# Altium PCB SSCS_PCB_2Layers.PcbDoc
Units mm, origin at the board's own origin, x right, y up, seen from the top; angles counter-clockwise.
Board outline 50.93 x 54.61 mm, 2 copper layers (Top Layer, Bottom Layer); 15 components, 35 nets, 400 pads, 22 vias.
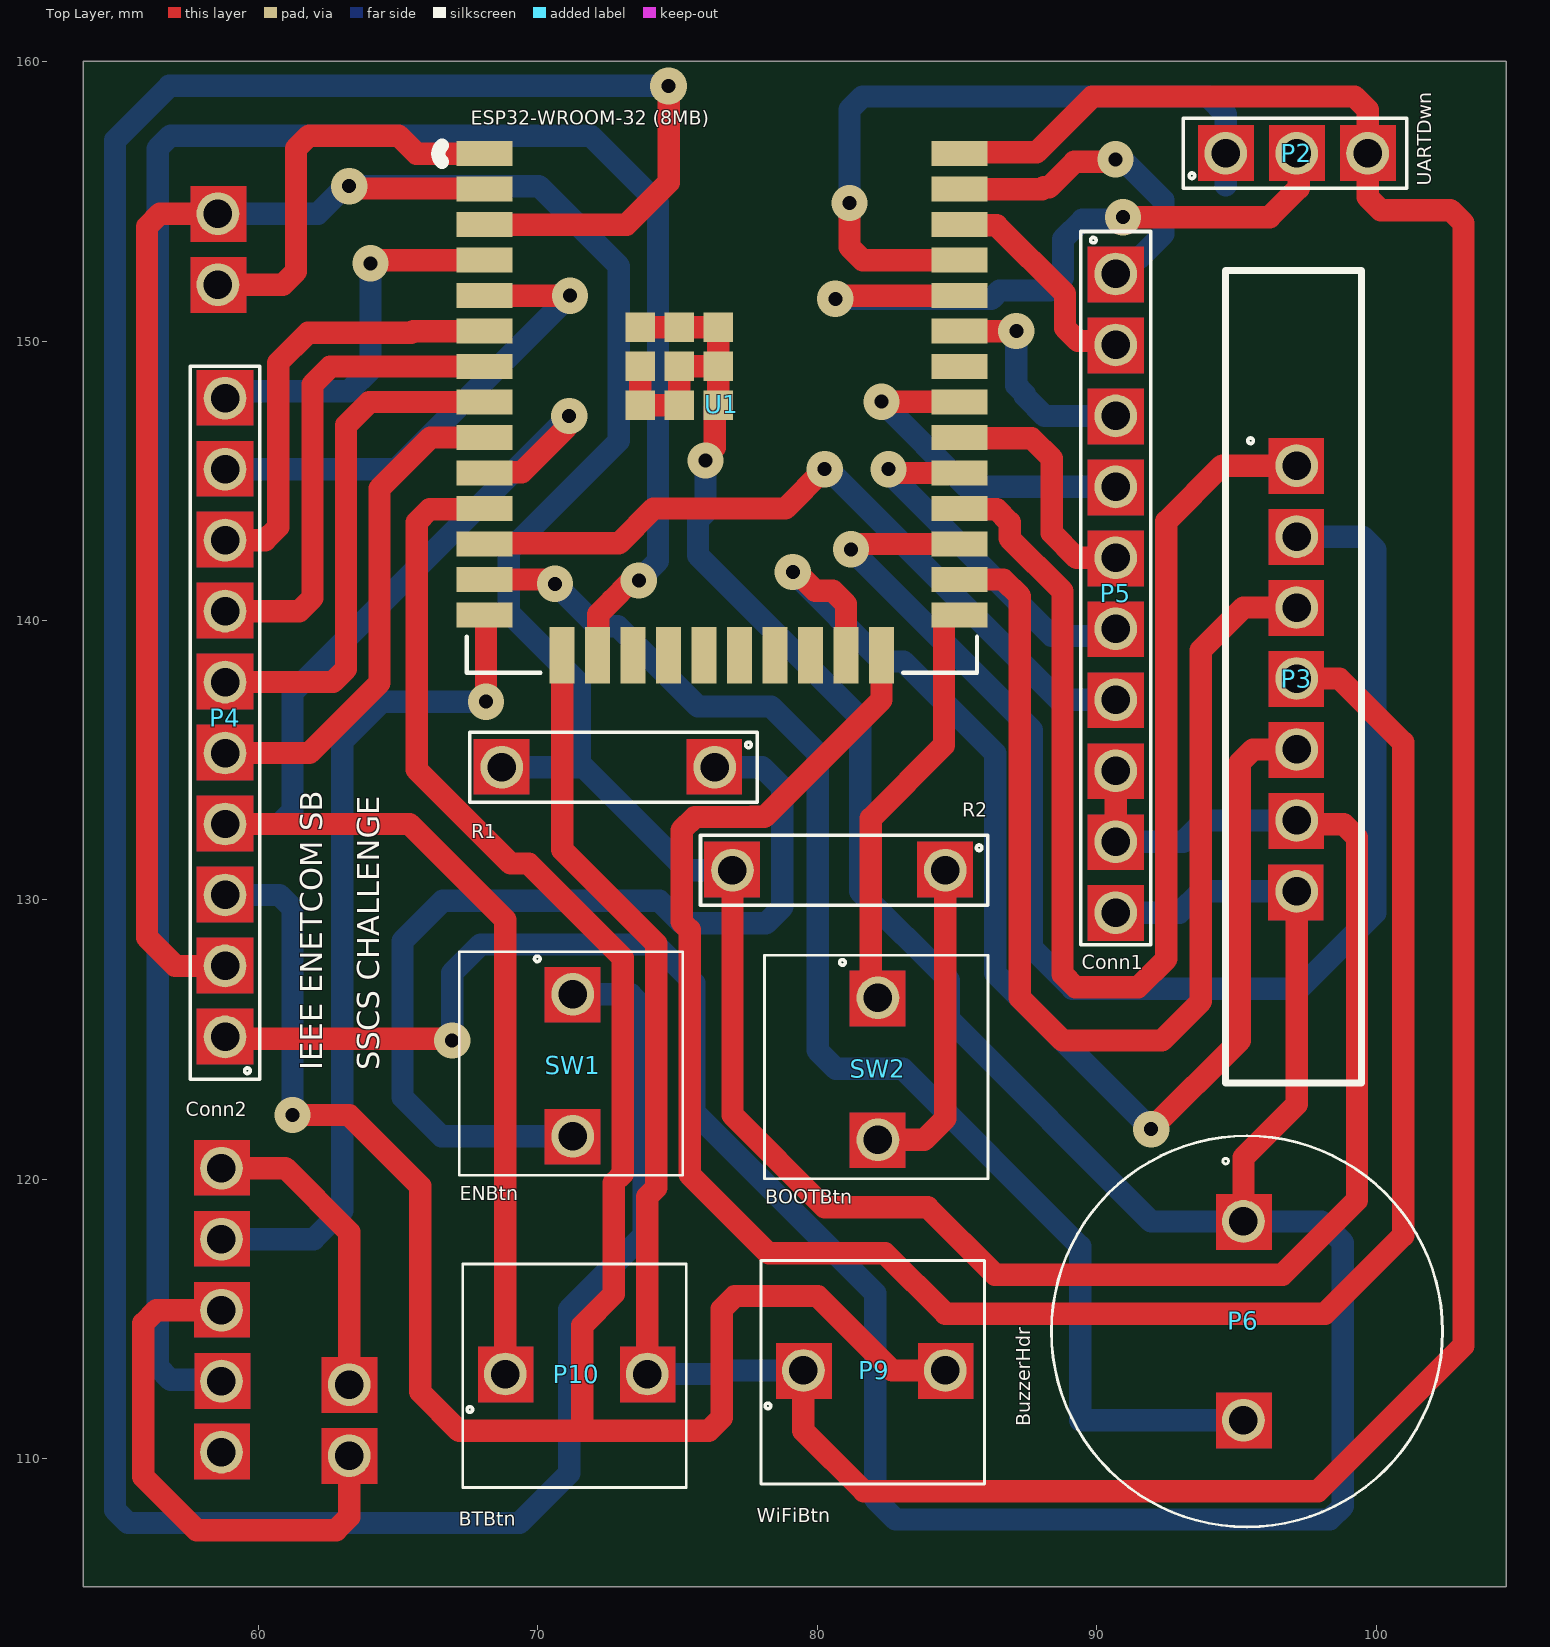
[diagram p0: Top Layer view]
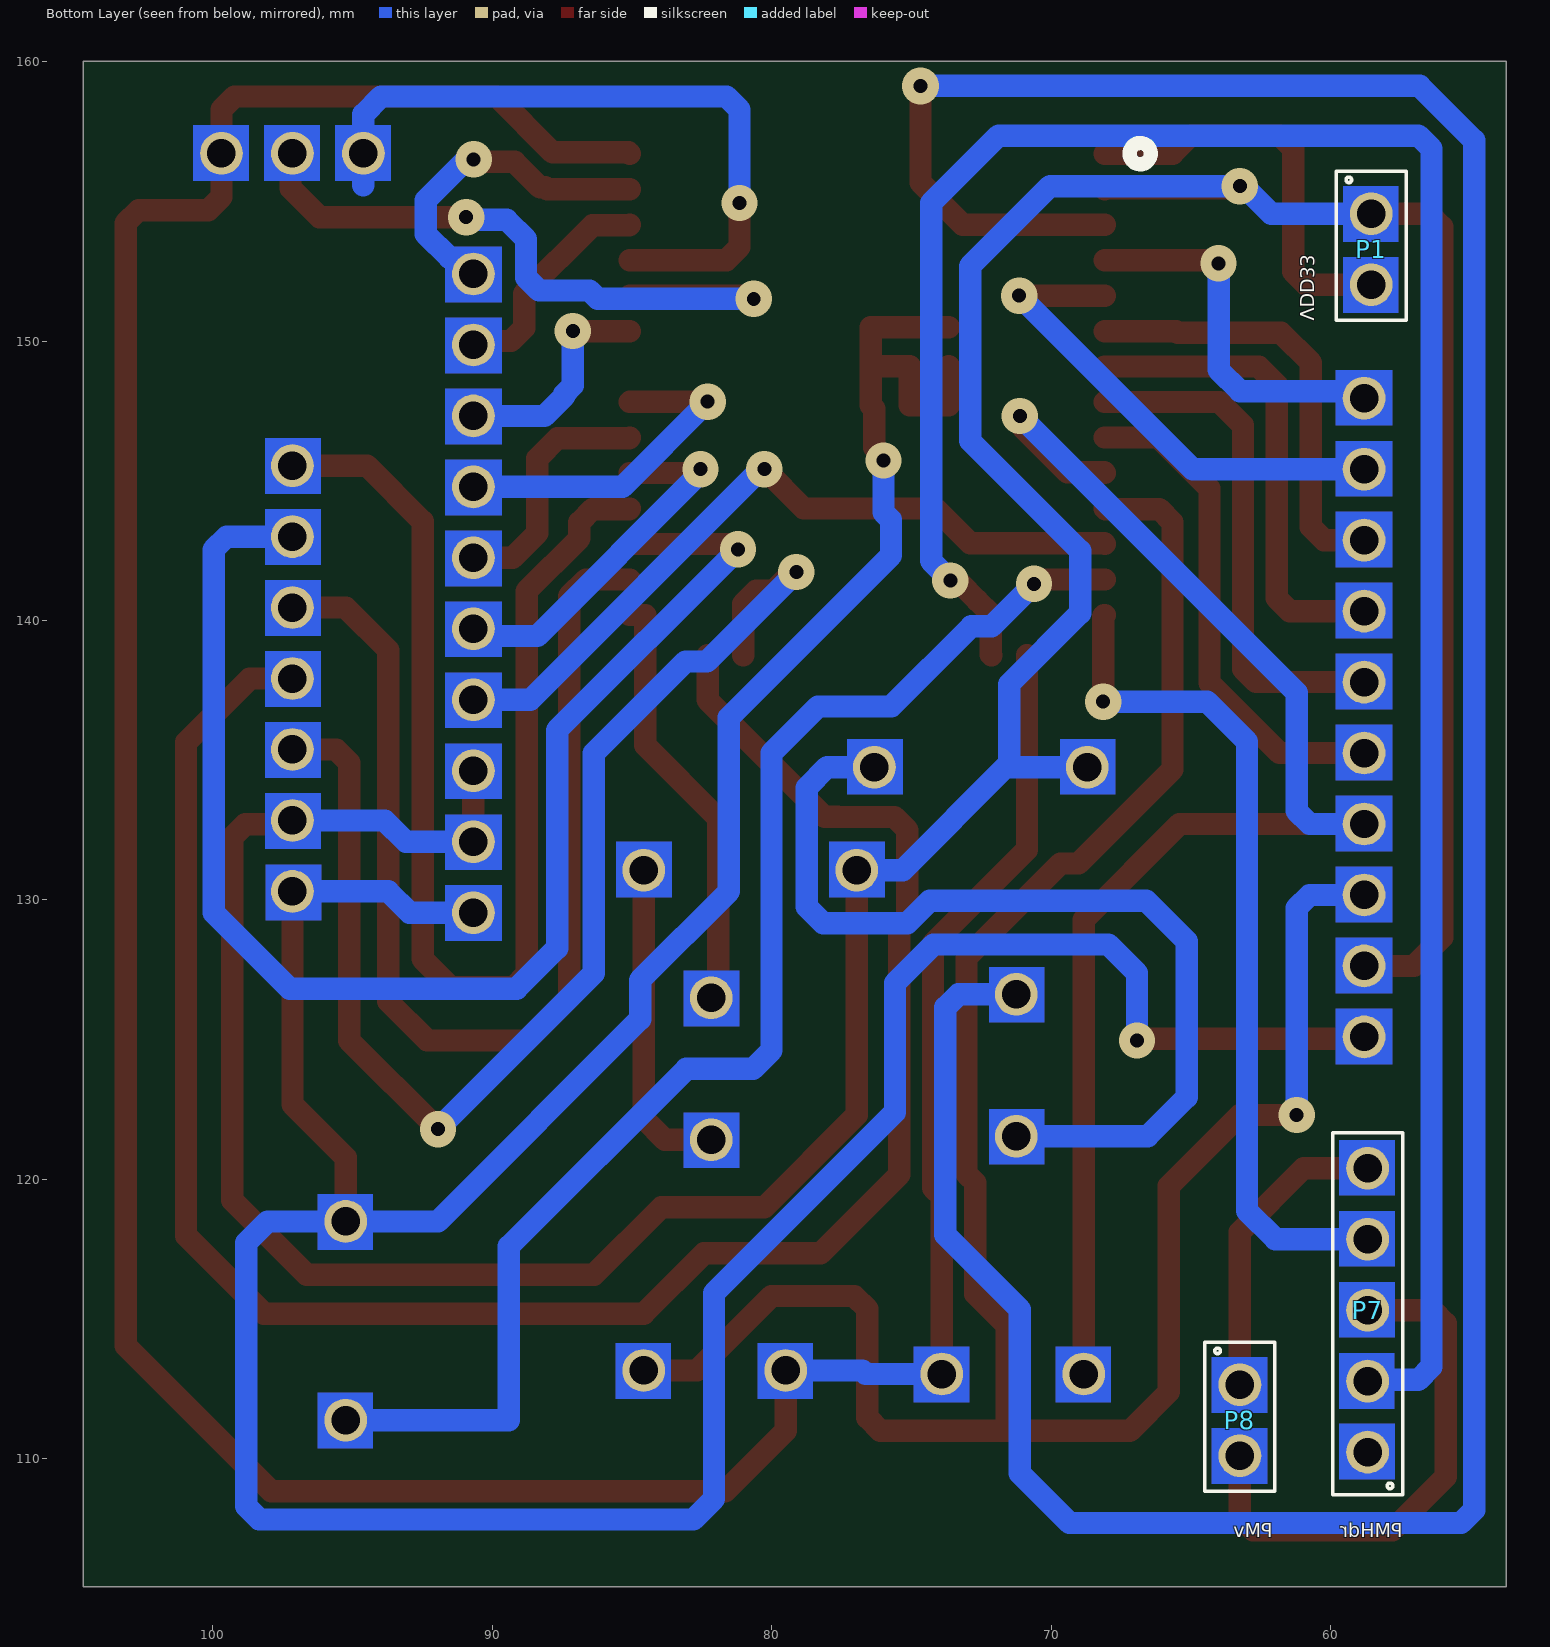
[diagram p1: Bottom Layer view, seen from below]

## Layer stack, top to bottom
Top Solder: solder mask 0.0102, Solder Resist, Dk 3.5
Top Layer: signal copper 0.0356
Dielectric 1: dielectric 0.32, FR-4, Dk 4.8
Bottom Layer: signal copper 0.0356
Bottom Solder: solder mask 0.0102, Solder Resist, Dk 3.5

## Board outline
53.721,105.41 104.648,105.41 104.648,160.02 53.721,160.02

## Design rules (kind name [scope] priority, off if disabled: settings)
Clearance [All] p1: gap=0.4 ignorepadtopadclearanceinfootprint=FALSE
PolygonConnect [All] p1: connectstyle=Relief reliefconductorwidth=0.254 reliefentries=4 polygonreliefangle="90 Angle" airgapwidth=0.254
RoutingVias [All] p1: holewidth=0.5 width=1.3 viastyle="Through Hole" minholewidth=0.5 minwidth=1.3 maxholewidth=0.5 maxwidth=1.3
SMDNeckDown [All] p1: percent=90.000
SolderMaskExpansion [All] p1: expansion=0.102 istentingtop=FALSE
Width [All] p1: maxlimit=1 minlimit=0.8 preferedwidth=0.8
30 further rules are at their usual default settings.

## Components (designator, comment, footprint, x,y, rotation, side; value= is the part's Value field where it differs from the comment)
P1 "VDD33" CONN2X2.54 58.547,145.669 r270 bottom
P2 "UARTDwn" CONN3X2.54 103.505,156.718 r0 top
P3 "OLEDHdr" CONN7X2.54 69.088,152.908 r270 top
P4 "Conn2" CONN10X2.54 58.801,133.985 r90 top
P5 "Conn1" CONN10X2.54 90.678,143.51 r270 top
P6 "BuzzerHdr" CONN2X2.54BUZZER 95.377,114.681 r270 top
P7 "PMHdr" CONN5X2.54 58.674,119.126 r90 bottom
P8 "PMv" CONN2X2.54 63.246,103.759 r270 bottom
P9 "WiFiBtn" SW 87.249,115.697 r0 top
P10 "BTBtn" SW 76.581,115.57 r0 top
R1 "RC1206FR-131RL" RES 67.437,134.747 r180 top
R2 "RC1206FR-131RL" RES 75.692,131.064 r180 top
SW1 "ENBtn" SW 73.787,118.872 r270 top
SW2 "BOOTBtn" SW 84.709,118.745 r270 top
U1 "ESP32-WROOM-32 (8MB)" "IC38_ESP32-WROOM-32 8MB_EXP" 76.581,151.003 r0 top

## Footprints (in the part's own frame and the unit in brackets; to place one, negate y for a bottom-side part, rotate by r counter-clockwise, add the part's x,y. Pads: shape width x height; smd on the part's side, far side on the other; paste and mask are expansions set on the pad)
CONN2X2.54 [mm]
  round 1.53 hole 1.02: 1(-8.89,0) 2(-6.35,0)
  Top Layer region: -7.334,0.984 -5.334,0.984 -5.334,-1.016 -7.334,-1.016
  Top Layer region: -9.874,0.984 -7.874,0.984 -7.874,-1.016 -9.874,-1.016
  Bottom Layer region: -7.334,0.984 -5.334,0.984 -5.334,-1.016 -7.334,-1.016
  Bottom Layer region: -9.874,0.984 -7.874,0.984 -7.874,-1.016 -9.874,-1.016
  silkscreen extent -10.41,-1.25 -5.08,1.25
CONN2X2.54BUZZER [mm]
  round 1.53 hole 1.02: 1(-3.81,-0.127) 2(3.302,-0.127)
  Top Layer region: 2.318,-1.111 4.318,-1.111 4.318,0.889 2.318,0.889
  Top Layer region: -4.794,-1.111 -2.794,-1.111 -2.794,0.889 -4.794,0.889
  Bottom Layer region: 2.318,-1.111 4.318,-1.111 4.318,0.889 2.318,0.889
  Bottom Layer region: -4.794,-1.111 -2.794,-1.111 -2.794,0.889 -4.794,0.889
  silkscreen extent -6.87,-7 7.13,7
CONN3X2.54 [mm]
  round 1.53 hole 1.02: 1(-8.89,0) 2(-6.35,0) 3(-3.81,0)
  Top Layer region: -4.794,-0.984 -2.794,-0.984 -2.794,1.016 -4.794,1.016
  Top Layer region: -7.334,-0.984 -5.334,-0.984 -5.334,1.016 -7.334,1.016
  Top Layer region: -9.874,-0.984 -7.874,-0.984 -7.874,1.016 -9.874,1.016
  Bottom Layer region: -4.794,-0.984 -2.794,-0.984 -2.794,1.016 -4.794,1.016
  Bottom Layer region: -7.334,-0.984 -5.334,-0.984 -5.334,1.016 -7.334,1.016
  Bottom Layer region: -9.874,-0.984 -7.874,-0.984 -7.874,1.016 -9.874,1.016
  silkscreen extent -10.41,-1.25 -2.41,1.25
CONN5X2.54 [mm]
  round 1.53 hole 1.02: 1(-8.89,0) 2(-6.35,0) 3(-3.81,0) 4(-1.27,0) 5(1.27,0)
  Top Layer region: -9.874,1.016 -7.874,1.016 -7.874,-0.984 -9.874,-0.984
  Top Layer region: -7.35,1.031 -5.35,1.031 -5.35,-0.969 -7.35,-0.969
  Top Layer region: -4.794,1.016 -2.794,1.016 -2.794,-0.984 -4.794,-0.984
  Top Layer region: -2.254,1.016 -0.254,1.016 -0.254,-0.984 -2.254,-0.984
  Top Layer region: 0.286,1.016 2.286,1.016 2.286,-0.984 0.286,-0.984
  Bottom Layer region: -9.874,1.016 -7.874,1.016 -7.874,-0.984 -9.874,-0.984
  Bottom Layer region: -7.35,1.031 -5.35,1.031 -5.35,-0.969 -7.35,-0.969
  Bottom Layer region: -4.794,1.016 -2.794,1.016 -2.794,-0.984 -4.794,-0.984
  Bottom Layer region: -2.254,1.016 -0.254,1.016 -0.254,-0.984 -2.254,-0.984
  Bottom Layer region: 0.286,1.016 2.286,1.016 2.286,-0.984 0.286,-0.984
  silkscreen extent -10.41,-1.25 2.54,1.25
CONN7X2.54 [mm]
  round 1.53 hole 1.02: 1(7.366,28.067) 2(9.906,28.067) 3(12.446,28.067) 4(14.986,28.067) 5(17.526,28.067) 6(20.066,28.067) 7(22.606,28.067)
  Top Layer region: 6.382,27.051 8.382,27.051 8.382,29.051 6.382,29.051
  Top Layer region: 21.644,27.034 23.644,27.034 23.644,29.034 21.644,29.034
  Top Layer region: 19.082,27.051 21.082,27.051 21.082,29.051 19.082,29.051
  Top Layer region: 16.542,27.051 18.542,27.051 18.542,29.051 16.542,29.051
  Top Layer region: 14.002,27.051 16.002,27.051 16.002,29.051 14.002,29.051
  Top Layer region: 11.462,27.051 13.462,27.051 13.462,29.051 11.462,29.051
  Top Layer region: 8.922,27.051 10.922,27.051 10.922,29.051 8.922,29.051
  Bottom Layer region: 21.644,27.034 23.644,27.034 23.644,29.034 21.644,29.034
  Bottom Layer region: 19.082,27.051 21.082,27.051 21.082,29.051 19.082,29.051
  Bottom Layer region: 16.542,27.051 18.542,27.051 18.542,29.051 16.542,29.051
  Bottom Layer region: 14.002,27.051 16.002,27.051 16.002,29.051 14.002,29.051
  Bottom Layer region: 11.462,27.051 13.462,27.051 13.462,29.051 11.462,29.051
  Bottom Layer region: 8.922,27.051 10.922,27.051 10.922,29.051 8.922,29.051
  Bottom Layer region: 6.382,27.051 8.382,27.051 8.382,29.051 6.382,29.051
  silkscreen extent 0.38,25.53 29.46,30.38
CONN10X2.54 [mm]
  round 1.53 hole 1.02: 1(-8.89,0) 2(-6.35,0) 3(-3.81,0) 4(-1.27,0) 5(1.27,0) 6(3.81,0) 7(6.35,0) 8(8.89,0) 9(11.43,0) 10(13.97,0)
  Top Layer region: -4.794,-1.016 -2.794,-1.016 -2.794,1.016 -4.794,1.016
  Top Layer region: -2.254,-1.016 -0.254,-1.016 -0.254,1.016 -2.254,1.016
  Top Layer region: 0.286,-1.016 2.286,-1.016 2.286,1.016 0.286,1.016
  Top Layer region: 2.826,-1.016 4.826,-1.016 4.826,1.016 2.826,1.016
  Top Layer region: 5.366,-1.016 7.366,-1.016 7.366,1.016 5.366,1.016
  Top Layer region: 7.906,-1.016 9.906,-1.016 9.906,1.016 7.906,1.016
  Top Layer region: 10.446,-1.016 12.446,-1.016 12.446,1.016 10.446,1.016
  Top Layer region: 12.986,-1.016 14.986,-1.016 14.986,1.016 12.986,1.016
  Top Layer region: -9.874,-1.016 -7.874,-1.016 -7.874,1.016 -9.874,1.016
  Top Layer region: -7.334,-1.016 -5.334,-1.016 -5.334,1.016 -7.334,1.016
  Bottom Layer region: -9.874,-1.016 -7.874,-1.016 -7.874,1.016 -9.874,1.016
  Bottom Layer region: -7.334,-1.016 -5.334,-1.016 -5.334,1.016 -7.334,1.016
  Bottom Layer region: -4.794,-1.016 -2.794,-1.016 -2.794,1.016 -4.794,1.016
  Bottom Layer region: -2.254,-1.016 -0.254,-1.016 -0.254,1.016 -2.254,1.016
  Bottom Layer region: 0.286,-1.016 2.286,-1.016 2.286,1.016 0.286,1.016
  Bottom Layer region: 2.826,-1.016 4.826,-1.016 4.826,1.016 2.826,1.016
  Bottom Layer region: 5.366,-1.016 7.366,-1.016 7.366,1.016 5.366,1.016
  Bottom Layer region: 7.906,-1.016 9.906,-1.016 9.906,1.016 7.906,1.016
  Bottom Layer region: 10.446,-1.016 12.446,-1.016 12.446,1.016 10.446,1.016
  Bottom Layer region: 12.986,-1.016 14.986,-1.016 14.986,1.016 12.986,1.016
  silkscreen extent -10.41,-1.25 15.11,1.25
"IC38_ESP32-WROOM-32 8MB_EXP" [mil]
  rect 79x35 on Top Solder paste+0 mask+0: 1(-334.65,224.56) 1(-334.65,224.56) 1(-334.65,224.56) 1(-334.65,224.56) 1(-334.65,224.56) 1(-334.65,224.56) 2(-334.65,174.56) 2(-334.65,174.56) 2(-334.65,174.56) 2(-334.65,174.56) 2(-334.65,174.56) 2(-334.65,174.56) 3(-334.65,124.56) 3(-334.65,124.56) 3(-334.65,124.56) 3(-334.65,124.56) 3(-334.65,124.56) 3(-334.65,124.56) 4(-334.65,74.56) 4(-334.65,74.56) 4(-334.65,74.56) 4(-334.65,74.56) 4(-334.65,74.56) 4(-334.65,74.56) 5(-334.65,24.56) 5(-334.65,24.56) 5(-334.65,24.56) 5(-334.65,24.56) 5(-334.65,24.56) 5(-334.65,24.56) 6(-334.65,-25.44) 6(-334.65,-25.44) 6(-334.65,-25.44) 6(-334.65,-25.44) 6(-334.65,-25.44) 6(-334.65,-25.44) 7(-334.65,-75.44) 7(-334.65,-75.44) 7(-334.65,-75.44) 7(-334.65,-75.44) 7(-334.65,-75.44) 7(-334.65,-75.44) 8(-334.65,-125.44) 8(-334.65,-125.44) 8(-334.65,-125.44) 8(-334.65,-125.44) 8(-334.65,-125.44) 8(-334.65,-125.44) 9(-334.65,-175.44) 9(-334.65,-175.44) 9(-334.65,-175.44) 9(-334.65,-175.44) 9(-334.65,-175.44) 9(-334.65,-175.44) 10(-334.65,-225.44) 10(-334.65,-225.44) 10(-334.65,-225.44) 10(-334.65,-225.44) 10(-334.65,-225.44) 10(-334.65,-225.44) 11(-334.65,-275.44) 11(-334.65,-275.44) 11(-334.65,-275.44) 11(-334.65,-275.44) 11(-334.65,-275.44) 11(-334.65,-275.44) 12(-334.65,-325.44) 12(-334.65,-325.44) 12(-334.65,-325.44) 12(-334.65,-325.44) 12(-334.65,-325.44) 12(-334.65,-325.44) 13(-334.65,-375.44) 13(-334.65,-375.44) 13(-334.65,-375.44) 13(-334.65,-375.44) 13(-334.65,-375.44) 13(-334.65,-375.44) 14(-334.65,-425.44) 14(-334.65,-425.44) 14(-334.65,-425.44) 14(-334.65,-425.44) 14(-334.65,-425.44) 14(-334.65,-425.44) 25(334.65,-425.44) 25(334.65,-425.44) 25(334.65,-425.44) 25(334.65,-425.44) 25(334.65,-425.44) 25(334.65,-425.44) 26(334.65,-375.44) 26(334.65,-375.44) 26(334.65,-375.44) 26(334.65,-375.44) 26(334.65,-375.44) 26(334.65,-375.44) 27(334.65,-325.44) 27(334.65,-325.44) 27(334.65,-325.44) 27(334.65,-325.44) 27(334.65,-325.44) 27(334.65,-325.44) 28(334.65,-275.44) 28(334.65,-275.44) 28(334.65,-275.44) 28(334.65,-275.44) 28(334.65,-275.44) 28(334.65,-275.44) 29(334.65,-225.44) 29(334.65,-225.44) 29(334.65,-225.44) 29(334.65,-225.44) 29(334.65,-225.44) 29(334.65,-225.44) 30(334.65,-175.44) 30(334.65,-175.44) 30(334.65,-175.44) 30(334.65,-175.44) 30(334.65,-175.44) 30(334.65,-175.44) 31(334.65,-125.44) 31(334.65,-125.44) 31(334.65,-125.44) 31(334.65,-125.44) 31(334.65,-125.44) 31(334.65,-125.44) 32(334.65,-75.44) 32(334.65,-75.44) 32(334.65,-75.44) 32(334.65,-75.44) 32(334.65,-75.44) 32(334.65,-75.44) 33(334.65,-25.44) 33(334.65,-25.44) 33(334.65,-25.44) 33(334.65,-25.44) 33(334.65,-25.44) 33(334.65,-25.44) 34(334.65,24.56) 34(334.65,24.56) 34(334.65,24.56) 34(334.65,24.56) 34(334.65,24.56) 34(334.65,24.56) 35(334.65,74.56) 35(334.65,74.56) 35(334.65,74.56) 35(334.65,74.56) 35(334.65,74.56) 35(334.65,74.56) 36(334.65,124.56) 36(334.65,124.56) 36(334.65,124.56) 36(334.65,124.56) 36(334.65,124.56) 36(334.65,124.56) 37(334.65,174.56) 37(334.65,174.56) 37(334.65,174.56) 37(334.65,174.56) 37(334.65,174.56) 37(334.65,174.56) 38(334.65,224.56) 38(334.65,224.56) 38(334.65,224.56) 38(334.65,224.56) 38(334.65,224.56) 38(334.65,224.56)
  rect 79x35 smd paste+0 mask+0: 1(-334.65,224.56) 1(-334.65,224.56) 1(-334.65,224.56) 2(-334.65,174.56) 2(-334.65,174.56) 2(-334.65,174.56) 3(-334.65,124.56) 3(-334.65,124.56) 3(-334.65,124.56) 4(-334.65,74.56) 4(-334.65,74.56) 4(-334.65,74.56) 5(-334.65,24.56) 5(-334.65,24.56) 5(-334.65,24.56) 6(-334.65,-25.44) 6(-334.65,-25.44) 6(-334.65,-25.44) 7(-334.65,-75.44) 7(-334.65,-75.44) 7(-334.65,-75.44) 8(-334.65,-125.44) 8(-334.65,-125.44) 8(-334.65,-125.44) 9(-334.65,-175.44) 9(-334.65,-175.44) 9(-334.65,-175.44) 10(-334.65,-225.44) 10(-334.65,-225.44) 10(-334.65,-225.44) 11(-334.65,-275.44) 11(-334.65,-275.44) 11(-334.65,-275.44) 12(-334.65,-325.44) 12(-334.65,-325.44) 12(-334.65,-325.44) 13(-334.65,-375.44) 13(-334.65,-375.44) 13(-334.65,-375.44) 14(-334.65,-425.44) 14(-334.65,-425.44) 14(-334.65,-425.44) 25(334.65,-425.44) 25(334.65,-425.44) 25(334.65,-425.44) 26(334.65,-375.44) 26(334.65,-375.44) 26(334.65,-375.44) 27(334.65,-325.44) 27(334.65,-325.44) 27(334.65,-325.44) 28(334.65,-275.44) 28(334.65,-275.44) 28(334.65,-275.44) 29(334.65,-225.44) 29(334.65,-225.44) 29(334.65,-225.44) 30(334.65,-175.44) 30(334.65,-175.44) 30(334.65,-175.44) 31(334.65,-125.44) 31(334.65,-125.44) 31(334.65,-125.44) 32(334.65,-75.44) 32(334.65,-75.44) 32(334.65,-75.44) 33(334.65,-25.44) 33(334.65,-25.44) 33(334.65,-25.44) 34(334.65,24.56) 34(334.65,24.56) 34(334.65,24.56) 35(334.65,74.56) 35(334.65,74.56) 35(334.65,74.56) 36(334.65,124.56) 36(334.65,124.56) 36(334.65,124.56) 37(334.65,174.56) 37(334.65,174.56) 37(334.65,174.56) 38(334.65,224.56) 38(334.65,224.56) 38(334.65,224.56)
  rect 35x79 on Top Paste paste-39.5 mask-39.5: 15(-225,-482.18) 15(-225,-482.18) 16(-175,-482.18) 16(-175,-482.18) 17(-125,-482.18) 17(-125,-482.18) 18(-75,-482.18) 18(-75,-482.18) 19(-25,-482.18) 19(-25,-482.18) 20(25,-482.18) 20(25,-482.18) 21(75,-482.18) 21(75,-482.18) 22(125,-482.18) 22(125,-482.18) 23(175,-482.18) 23(175,-482.18) 24(225,-482.18) 24(225,-482.18)
  rect 35x79 on Top Solder paste-39.5 mask-39.5: 15(-225,-482.18) 15(-225,-482.18) 16(-175,-482.18) 16(-175,-482.18) 17(-125,-482.18) 17(-125,-482.18) 18(-75,-482.18) 18(-75,-482.18) 19(-25,-482.18) 19(-25,-482.18) 20(25,-482.18) 20(25,-482.18) 21(75,-482.18) 21(75,-482.18) 22(125,-482.18) 22(125,-482.18) 23(175,-482.18) 23(175,-482.18) 24(225,-482.18) 24(225,-482.18)
  rect 35x79 smd paste-39.5 mask-39.5: 15(-225,-482.18) 16(-175,-482.18) 17(-125,-482.18) 18(-75,-482.18) 19(-25,-482.18) 20(25,-482.18) 21(75,-482.18) 22(125,-482.18) 23(175,-482.18) 24(225,-482.18)
  rect 41.34x41.34 on Top Paste paste-26 mask-26: 39(-115,-20) 39(-115,-20) 40(-60,-20) 40(-60,-20) 41(-5,-20) 41(-5,-20) 42(-115,-75) 42(-115,-75) 43(-60,-75) 43(-60,-75) 44(-5,-75) 44(-5,-75) 45(-115,-130) 45(-115,-130) 46(-60,-130) 46(-60,-130) 47(-5,-130) 47(-5,-130)
  rect 41.34x41.34 on Top Solder paste-26 mask-26: 39(-115,-20) 39(-115,-20) 40(-60,-20) 40(-60,-20) 41(-5,-20) 41(-5,-20) 42(-115,-75) 42(-115,-75) 43(-60,-75) 43(-60,-75) 44(-5,-75) 44(-5,-75) 45(-115,-130) 45(-115,-130) 46(-60,-130) 46(-60,-130) 47(-5,-130) 47(-5,-130)
  rect 41.34x41.34 smd paste-26 mask-26: 39(-115,-20) 40(-60,-20) 41(-5,-20) 42(-115,-75) 43(-60,-75) 44(-5,-75) 45(-115,-130) 46(-60,-130) 47(-5,-130)
  silkscreen extent -400,-507 360,236, body extent -350,-482 359,522, height 126
RES [mm]
  round 1.53 hole 1.02: 1(-8.89,0) 2(-1.27,0)
  Top Layer region: -9.874,-1.016 -7.874,-1.016 -7.874,0.984 -9.874,0.984
  Top Layer region: -2.254,-1.016 -0.254,-1.016 -0.254,0.984 -2.254,0.984
  Bottom Layer region: -9.874,-1.016 -7.874,-1.016 -7.874,0.984 -9.874,0.984
  Bottom Layer region: -2.254,-1.016 -0.254,-1.016 -0.254,0.984 -2.254,0.984
  silkscreen extent -10.41,-1.25 -0.13,1.25
SW [mm]
  round 1.53 hole 1.02: 1(-7.747,-2.54) 2(-2.667,-2.54)
  Top Layer region: -3.651,-3.556 -1.651,-3.556 -1.651,-1.556 -3.651,-1.556
  Top Layer region: -8.731,-3.556 -6.731,-3.556 -6.731,-1.556 -8.731,-1.556
  Bottom Layer region: -8.731,-3.556 -6.731,-3.556 -6.731,-1.556 -8.731,-1.556
  Bottom Layer region: -3.651,-3.556 -1.651,-3.556 -1.651,-1.556 -3.651,-1.556
  silkscreen extent -9.27,-6.6 -1.27,1.4

## Part data
P1 P6 P8 P9 P10: library part MHDR1X2, "Header, 2-Pin", LatestRevisionDate=17-Jul-2002, LatestRevisionNote="Re-released for DXP Platform.", Publisher="Altium Limited"
P2: library part MHDR1X3, "Header, 3-Pin", LatestRevisionDate=17-Jul-2002, LatestRevisionNote="Re-released for DXP Platform.", Publisher="Altium Limited"
P3: library part MHDR1X7, "Header, 7-Pin", LatestRevisionDate=17-Jul-2002, LatestRevisionNote="Re-released for DXP Platform.", Publisher="Altium Limited"
P4 P5: library part MHDR1X10, "Header, 10-Pin", LatestRevisionDate=17-Jul-2002, LatestRevisionNote="Re-released for DXP Platform.", Publisher="Altium Limited"
P7: library part MHDR1X5, "Header, 5-Pin", LatestRevisionDate=17-Jul-2002, LatestRevisionNote="Re-released for DXP Platform.", Publisher="Altium Limited"
R1 R2: "RC Series 1206 0.25 W 0 O Jumper Surface Mount Thick Film Chip Resistor", Package=None, Availability=Unavailable, MP=RC1206FR-131RL, Price=None
SW1 SW2: library part 147873-1, "Switch Tactile OFF (ON) SPST Rectangular Button J-Bend 0.05A 24VDC 1.77N SMD T/R", Package=None, Availability=Unavailable, MF="TE Connectivity", MP=147873-1, Price=None, SnapEDA_Link=https://www.snapeda.com/parts/147873-1/TE%20Connectivity%20ALCOSWITCH%20Switches/view-part/2549694/?ref=snap
U1: library part "ESP32-WROOM-32 8MB", "No Description Available", Mfr_Name="Espressif Systems", Copyright="Copyright (C) 2023 Ultra Librarian. All rights reserved.", Manufacturer_Part_Number="ESP32-WROOM-32 (8MB)", RefDes=RefDes, Type=DEV

## Via types
v1: diameter 1.3, hole 0.5, Top Layer to Bottom Layer, 21 vias
v2: diameter 1.33, hole 0.5, Top Layer to Bottom Layer, 1 vias

## Nets (pads, with @x,y where several pads share a name; then routed paths per layer and width w, separated by ;. In a path a pad name is that pad's centre, name@x,y a point inside that pad or via, vN(x,y) a via of type N, cw(c..) or ccw(c..) an arc to the next point about the centre after c; other vN are vias at no path point)
BOOT: SW2.1 U1.25@85.081,140.197 | length 15.3
  Top Layer w0.8: SW2.1@81.915,126.492 81.915,132.918 84.531,135.534 84.531,140.197 U1.25@85.081,140.197
CS: P3.1 U1.28@85.081,144.007 | length 44.4
  Top Layer w0.8: U1.28@85.081,144.007 85.107,143.981 86.416,143.981 86.884,143.513 86.884,142.94 88.773,141.051 88.773,127.342 89.242,126.873 91.479,126.873 92.494,127.888 92.494,130.855 92.494,143.548 94.488,145.542 P3.1
D0: P3.5 U1.23@81.026,138.756 | length 46.6
  Top Layer w0.8: v1(79.121,141.732) 79.256,141.732 79.931,141.058 80.557,141.058 81.026,140.589 U1.23@81.026,138.756 ; v1(91.948,121.793) 95.123,124.968 95.123,134.913 95.592,135.382 P3.5
  Bottom Layer w0.8: v1(79.121,141.732) 82.322,138.531 83.084,138.531 86.366,135.249 86.366,127.375 v1(91.948,121.793)
D1: P3.4 U1.24@82.296,138.756 | length 74.3
  Top Layer w0.8: U1.24@82.296,138.756 82.296,137.16 78.105,132.969 77.648,132.969 77.642,132.963 75.615,132.963 75.146,132.494 75.146,129.214 75.431,128.928 75.431,120.173 78.256,117.348 82.423,117.348 84.582,115.189 98.171,115.189 100.965,117.983 100.965,135.636 98.679,137.922 P3.4
DC: P3.2 U1.27@85.081,142.737 | length 50.9
  Top Layer w0.8: v1(81.206,142.547) 81.341,142.547 81.531,142.737 U1.27@85.081,142.737
  Bottom Layer w0.8: v1(81.206,142.547) 87.681,136.072 87.681,128.27 89.129,126.822 97.257,126.822 99.974,129.54 99.974,142.533 99.506,143.002 P3.2
EN: SW1.1 U1.3@68.081,154.167 | length 118
  Top Layer w0.8: U1.3@68.081,154.167 73.169,154.167 74.676,155.674 v2(74.676,159.131)
  Bottom Layer w0.8: SW1.1 73.318,126.619 73.787,126.15 73.787,118.008 71.12,115.341 71.12,109.474 69.342,107.696 55.333,107.696 54.864,108.165 54.864,157.184 56.811,159.131 v2(74.676,159.131)
GND0: P3.7 P4.1 P5.10 P6.1 U1.39@73.66,150.495 U1.40@75.057,150.495 U1.41@76.454,150.495 U1.42@73.66,149.098 U1.43@75.057,149.098 U1.44@76.454,149.098 U1.45@73.66,147.701 U1.46@75.057,147.701 U1.47@76.454,147.701 | length 142
  Top Layer w0.8: P4.1 58.864,125.031 66.865,125.031 v1(66.929,124.968) ; U1.42@73.66,149.098 73.66,147.701 75.057,147.701 75.057,149.098 U1.44@76.454,149.098 ; U1.39@73.66,150.495 75.057,150.495 76.454,150.495 U1.44@76.454,149.098 ; v1(75.999,145.722) 75.999,145.857 76.329,146.188 76.329,147.576 76.454,147.701 U1.44@76.454,149.098 ; P6.1 95.25,120.777 97.155,122.682 P3.7
  Bottom Layer w0.8: v1(66.929,124.968) 66.929,127.381 67.951,128.403 74.213,128.403 75.59,127.025 75.59,122.403 82.067,115.926 82.067,108.56 82.804,107.823 98.337,107.823 98.806,108.292 98.806,117.729 98.044,118.491 P6.1 91.948,118.491 84.709,125.73 84.709,127.127 81.534,130.302 81.534,136.525 75.73,142.329 75.73,143.599 75.999,143.868 v1(75.999,145.722) ; P5.10 92.964,129.54 93.726,130.302 P3.7
GND1: P1.2 U1.1@68.081,156.707 | length 14.6
  Top Layer w0.8: P1.2 60.872,152.019 61.341,152.488 61.341,156.884 61.81,157.353 65.008,157.353 65.654,156.707 U1.1@68.081,156.707
GND2: P2.3 P9.1 P10.2 U1.15@70.866,138.756 U1.38@85.081,156.707 | length 124.6
  Top Layer w0.8: U1.15@70.866,138.756 70.866,131.796 74.231,128.431 74.231,119.695 73.914,119.378 P10.2 ; P9.1 79.502,110.998 81.661,108.839 97.917,108.839 103.124,114.046 103.124,154.217 102.655,154.686 100.164,154.686 99.695,155.155 99.695,155.948 99.581,156.062 99.581,156.604 P2.3 99.695,158.281 99.226,158.75 89.842,158.75 87.843,156.751 85.125,156.751 U1.38@85.081,156.707
  Bottom Layer w0.8: P10.2 76.632,113.03 76.759,113.157 P9.1
GND_1: P7.5 P8.1 | length 11
  Top Layer w0.8: P7.5 60.96,120.396 63.246,118.11 P8.1
IO5: P5.6 U1.29@85.081,145.277 | length 13.4
  Top Layer w0.8: v1(82.55,145.415) 82.677,145.415 82.815,145.277 U1.29@85.081,145.277
  Bottom Layer w0.8: v1(82.55,145.415) 82.55,145.288 88.392,139.446 89.908,139.446 90.022,139.56 90.538,139.56 P5.6
IO12: P7.4 U1.14@68.081,140.197 | length 30.4
  Top Layer w0.8: U1.14@68.081,140.197 68.095,140.197 68.14,140.152 v1(68.14,137.092)
  Bottom Layer w0.8: P7.4 61.976,117.856 62.992,118.872 62.992,135.661 64.423,137.092 v1(68.14,137.092)
IO13: P7.2 U1.16@72.136,138.756 | length 82.4
  Top Layer w0.8: U1.16@72.136,138.756 72.162,138.781 72.162,140.223 72.646,140.707 72.646,140.718 73.265,141.337 73.519,141.337 v1(73.609,141.427)
  Bottom Layer w0.8: P7.2 58.627,112.823 56.857,112.823 56.388,113.292 56.388,156.884 56.857,157.353 71.882,157.353 74.295,154.94 74.295,142.131 73.609,141.445 v1(73.609,141.427)
IO14: P6.2 U1.13@68.081,141.467 | length 49.5
  Top Layer w0.8: U1.13@68.081,141.467 70.322,141.467 70.477,141.312 v1(70.612,141.312)
  Bottom Layer w0.8: v1(70.612,141.312) 72.134,139.79 72.86,139.79 75.73,136.921 78.344,136.921 80.01,135.255 80.01,124.612 80.67,123.952 83.058,123.952 89.408,117.602 89.408,111.379 P6.2
IO18: P5.5 U1.30@85.081,146.547 | length 8.9
  Top Layer w0.8: U1.30@85.081,146.547 85.107,146.521 87.667,146.521 88.392,145.796 88.392,143.129 89.281,142.24 P5.5
IO19: P5.4 U1.31@85.081,147.817 | length 12.4
  Top Layer w0.8: v1(82.296,147.828) 82.302,147.822 85.075,147.822 U1.31@85.081,147.817
  Bottom Layer w0.8: v1(82.296,147.828) 85.344,144.78 P5.4
IO21: P5.3 U1.33@85.081,150.357 | length 8
  Top Layer w0.8: U1.33@85.081,150.357 v1(87.122,150.357)
  Bottom Layer w0.8: v1(87.122,150.357) 87.122,148.408 87.423,148.107 87.423,148.035 88.138,147.32 P5.3
IO22: P5.2 U1.36@85.081,154.167 | length 8.1
  Top Layer w0.8: U1.36@85.081,154.167 85.107,154.141 86.416,154.141 88.862,151.695 88.862,150.468 89.331,150 90.538,150 P5.2
IO23: P5.1 U1.37@85.081,155.437 | length 11.9
  Top Layer w0.8: U1.37@85.081,155.437 88.041,155.437 88.104,155.5 88.289,155.5 89.201,156.412 90.58,156.412 v1(90.67,156.502)
  Bottom Layer w0.8: v1(90.67,156.502) 90.765,156.406 91.018,156.406 92.39,155.035 92.39,153.833 91.541,152.984 91.459,152.984 90.876,152.4 P5.1
IO25: P4.4 P10.1 U1.10@68.081,145.277 | length 52.6
  Top Layer w0.8: P4.4 65.405,132.715 68.834,129.286 P10.1 ; U1.10@68.081,145.277 68.106,145.302 69.416,145.302 71.024,146.911 71.024,147.224 v1(71.12,147.32)
  Bottom Layer w0.8: P4.4 60.745,132.715 61.214,133.184 61.214,137.414 v1(71.12,147.32)
IO26: P4.3 P9.2 U1.11@68.081,144.007 | length 86.7
  Top Layer w0.8: v1(61.214,122.301) 63.246,122.301 65.786,119.761 65.786,112.395 67.183,110.998 71.589,110.998 ; U1.11@68.081,144.007 68.055,143.981 66.128,143.981 65.659,143.513 65.659,134.664 69.024,131.299 69.666,131.299 73.031,127.934 73.031,120.192 72.714,119.875 72.714,115.894 71.589,114.769 71.589,110.998 ; P9.2@84.328,113.157 82.677,113.157 80.01,115.824 77.05,115.824 76.581,115.355 76.581,111.467 76.112,110.998 71.589,110.998
  Bottom Layer w0.8: P4.3 60.745,130.175 61.214,129.706 v1(61.214,122.301)
IO27: P5.7 U1.12@68.081,142.737 | length 27.1
  Top Layer w0.8: U1.12@68.081,142.737 68.106,142.762 72.894,142.762 74.138,144.007 78.856,144.007 v1(80.264,145.415)
  Bottom Layer w0.8: v1(80.264,145.415) 80.388,145.415 88.643,137.16 P5.7
IO32: P4.6 U1.8@68.081,147.817 | length 18.5
  Top Layer w0.8: P4.6 62.663,137.795 63.132,138.264 63.132,146.98 63.969,147.817 U1.8@68.081,147.817
IO33: P4.5 U1.9@68.081,146.547 | length 18
  Top Layer w0.8: P4.5 61.82,135.255 64.332,137.767 64.332,144.723 66.156,146.547 U1.9@68.081,146.547
IO34: P4.8 U1.6@68.081,150.357 | length 15.8
  Top Layer w0.8: P4.8 60.237,142.875 60.706,143.344 60.706,149.225 61.773,150.292 65.47,150.292 65.535,150.357 U1.6@68.081,150.357
IO35: P4.7 U1.7@68.081,149.087 | length 17.4
  Top Layer w0.8: P4.7 61.463,140.335 61.932,140.804 61.932,148.447 62.572,149.087 U1.7@68.081,149.087
NetR1_1: R1.1 SW1.2 | length 34
  Bottom Layer w0.8: SW1.2 66.548,121.539 65.151,122.936 65.151,128.524 66.591,129.964 74.349,129.964 75.154,129.159 78.156,129.159 78.746,129.749 78.746,134.018 78.017,134.747 R1.1
NetR2_1: R2.1 SW2.2 | length 11.9
  Top Layer w0.8: SW2.2@81.915,121.412 83.82,121.412 84.582,122.174 R2.1
RES: P3.3 U1.26@85.081,141.467 | length 41.1
  Top Layer w0.8: U1.26@85.081,141.467 86.651,141.467 87.249,140.868 87.249,126.492 88.773,124.968 92.329,124.968 93.726,126.365 93.726,138.938 95.25,140.462 P3.3
RXD0: P2.2 U1.34@85.081,151.627 | length 24.8
  Top Layer w0.8: v1(80.645,151.511) 80.772,151.511 80.888,151.627 U1.34@85.081,151.627 ; v1(90.94,154.434) 96.188,154.434 97.224,155.47 97.224,156.649 P2.2
  Bottom Layer w0.8: v1(80.645,151.511) 86.226,151.511 86.521,151.807 88.325,151.807 88.794,152.275 88.794,153.647 89.485,154.338 90.844,154.338 v1(90.94,154.434)
SENSOR_VN: P4.9 U1.5@68.081,151.627 | length 18
  Top Layer w0.8: U1.5@68.081,151.627 v1(71.145,151.627)
  Bottom Layer w0.8: P4.9 64.934,145.415 v1(71.145,151.627)
SENSOR_VP: P4.10 U1.4@68.081,152.897 | length 13.6
  Top Layer w0.8: v1(64.008,152.781) 64.135,152.781 64.251,152.897 U1.4@68.081,152.897
  Bottom Layer w0.8: P4.10 58.941,148.095 59.457,148.095 59.571,148.209 63.246,148.209 64.008,148.971 v1(64.008,152.781)
TXD0: P2.1 U1.35@85.081,152.897 | length 25.5
  Top Layer w0.8: v1(81.153,154.94) 81.153,153.365 81.622,152.897 U1.35@85.081,152.897
  Bottom Layer w0.8: v1(81.153,154.94) 81.153,158.281 81.622,158.75 93.98,158.75 94.615,158.115 94.615,155.575
VDD33: P1.1 P3.6 P4.2 P5.8 P5.9 R1.2 R2.2 U1.2@68.081,155.437 | length 141.9
  Top Layer w0.8: P1.1 56.476,154.559 56.007,154.09 56.007,128.651 57.023,127.635 P4.2 ; v1(63.246,155.543) 63.327,155.462 68.055,155.462 U1.2@68.081,155.437 ; R2.2 76.962,122.301 80.264,118.999 83.947,118.999 86.36,116.586 96.647,116.586 99.314,119.253 99.314,132.234 98.845,132.702 97.295,132.702 P3.6 ; P5.9 P5.8
  Bottom Layer w0.8: P1.1 62.127,154.559 63.111,155.543 70.034,155.543 72.898,152.679 72.898,146.431 68.961,142.494 68.961,140.259 71.501,137.719 71.501,134.747 ; R1.2 71.501,134.747 ; R2.2 75.311,131.064 71.628,134.747 71.501,134.747 ; P5.9 93.091,132.08 93.853,132.842 P3.6
VDD33_1: P7.3 P8.2 | length 19
  Top Layer w0.8: P7.3 56.349,115.316 55.88,114.847 55.88,109.347 57.785,107.442 62.777,107.442 63.246,107.911 P8.2
pads on no net: P7.1 U1.1@68.081,156.707 U1.2@68.081,155.437 U1.3@68.081,154.167 U1.4@68.081,152.897 U1.5@68.081,151.627 U1.6@68.081,150.357 U1.7@68.081,149.087 U1.8@68.081,147.817 U1.9@68.081,146.547 U1.10@68.081,145.277 U1.11@68.081,144.007 U1.12@68.081,142.737 U1.13@68.081,141.467 U1.14@68.081,140.197 U1.15@70.866,138.756 U1.16@72.136,138.756 U1.17 U1.18 U1.19 U1.20 U1.21 U1.22 U1.23@81.026,138.756 U1.24@82.296,138.756 U1.25@85.081,140.197 U1.26@85.081,141.467 U1.27@85.081,142.737 U1.28@85.081,144.007 U1.29@85.081,145.277 U1.30@85.081,146.547 U1.31@85.081,147.817 U1.32 U1.33@85.081,150.357 U1.34@85.081,151.627 U1.35@85.081,152.897 U1.36@85.081,154.167 U1.37@85.081,155.437 U1.38@85.081,156.707 U1.39@73.66,150.495 U1.40@75.057,150.495 U1.41@76.454,150.495 U1.42@73.66,149.098 U1.43@75.057,149.098 U1.44@76.454,149.098 U1.45@73.66,147.701 U1.46@75.057,147.701 U1.47@76.454,147.701

## Silkscreen, mask and mechanical layers (free items; w line width, h text height)
Top Overlay:
  text "IEEE ENETCOM SB" at 62.284,123.898 h0.8 r90
  text "SSCS CHALLENGE" at 64.316,123.898 h0.8 r90
Board Shape:
  the board outline again, w1.2